# Altium PCB Carte_OPB-4L.PcbDoc
Units mm, origin at the board's own origin, x right, y up, seen from the top; angles counter-clockwise.
Board outline 18.5 x 10.6 mm, 4 copper layers (Top Copper, Ground Plane, Power Plane, Bottom Copper), stack 1.57 mm thick; 11 components, 7 nets, 32 pads, 4 vias.
Unrouted connection lines stored in the file: 6.
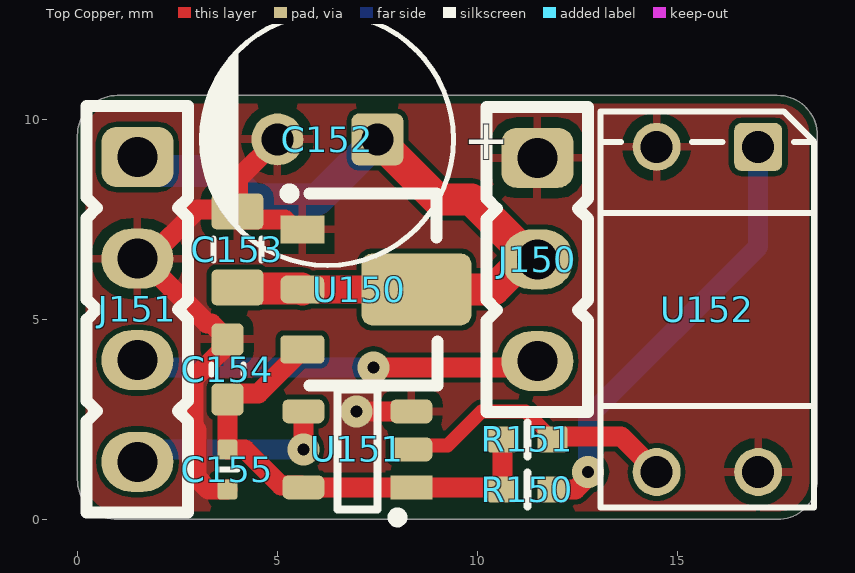
[diagram p0: Top Copper view]
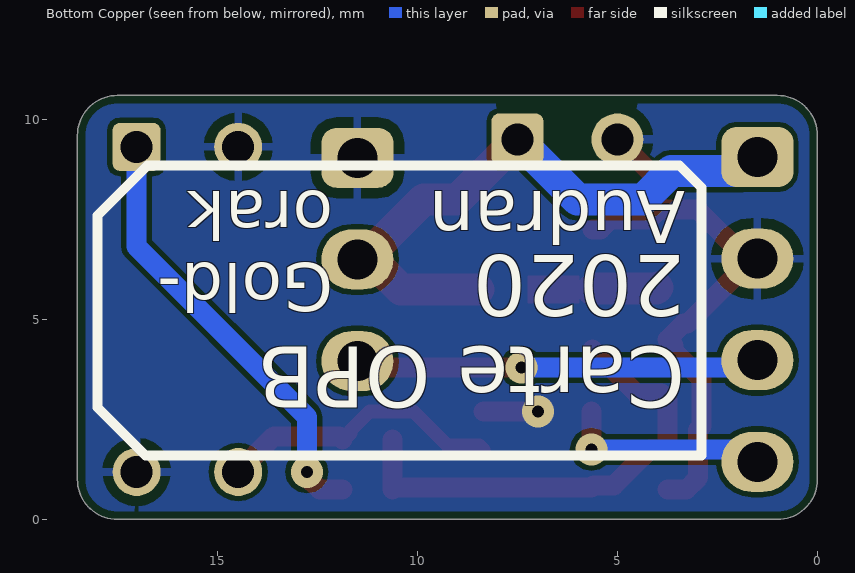
[diagram p1: Bottom Copper view, seen from below]
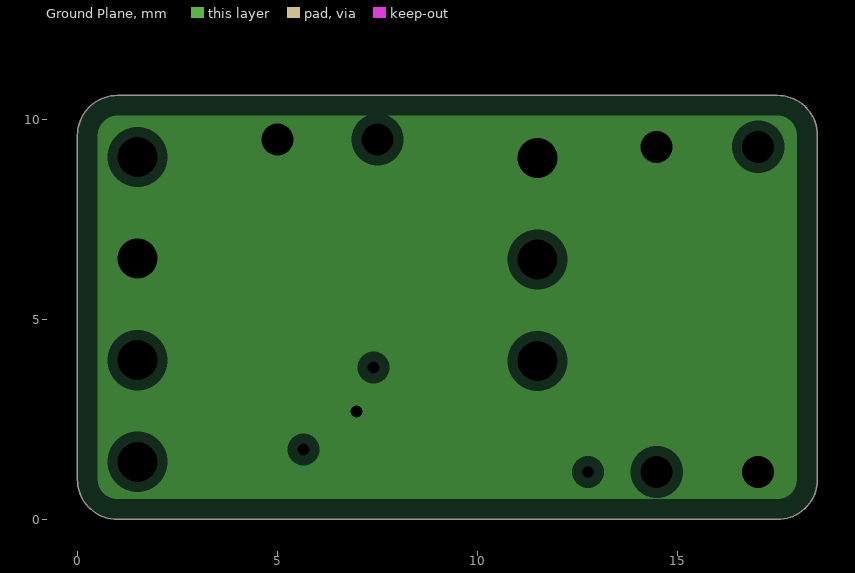
[diagram p2: Ground Plane, clearances drawn from the general rule]
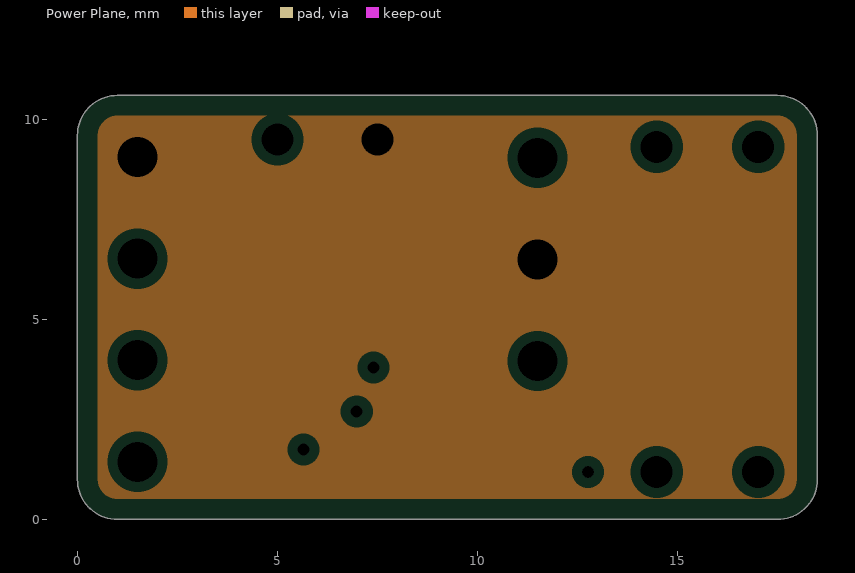
[diagram p3: Power Plane, clearances drawn from the general rule]
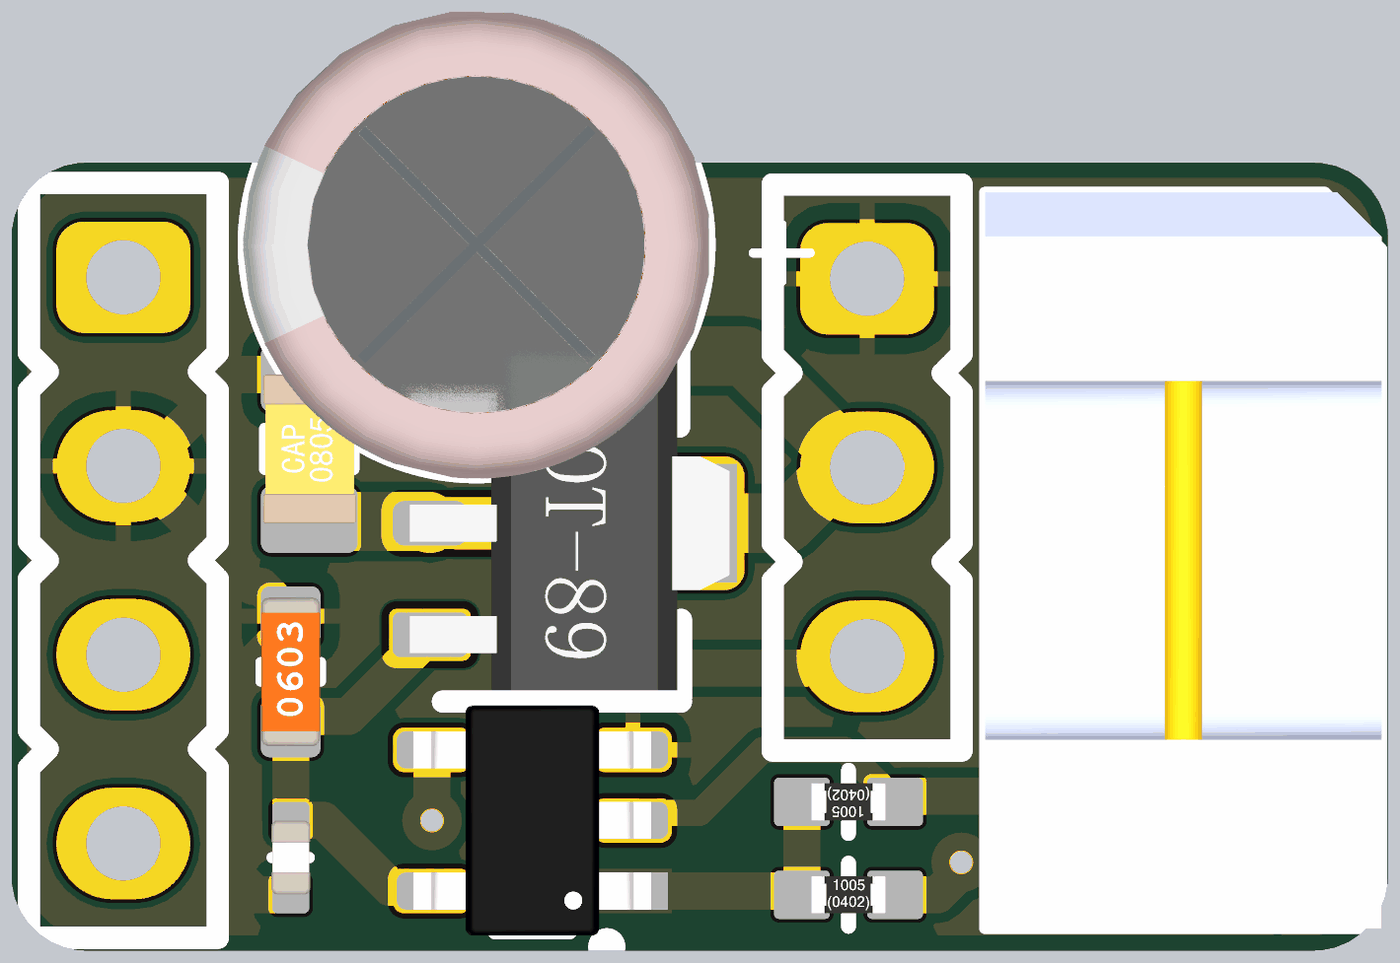
[diagram p4: 3D render of the assembled board from above, using the file's embedded part models]

## Layer stack, top to bottom
Top Mask: solder mask 0.015, Solder Resist, Dk 3.8
Top Copper: signal copper 0.035
Dielectric 1: prepreg 0.2, 7628, Dk 4.6
Ground Plane: plane copper 0.0175, net GND
Core: core 1.065, FR-4, Dk 4.5
Power Plane: plane copper 0.0175, net 5P
Dielectric 2: prepreg 0.2, 7628, Dk 4.6
Bottom Copper: signal copper 0.035
Bottom Mask: solder mask 0.015, Solder Resist, Dk 3.8

## Board outline
0,1 ccw(c1,1) 1,0 17.5,0 ccw(c17.5,1) 18.5,1 18.5,9.6 ccw(c17.5,9.6) 17.5,10.6 1,10.6 ccw(c1,9.6) 0,9.6

## Design rules (kind name [scope] priority, off if disabled: settings)
AssemblyTestPointUsage [All] p1 off:
AssemblyTestpoint [All] p1 off: testpointundercomponent=TRUE minsize=1.016 maxsize=2.54 preferedsize=1.524 minholesize=0 maxholesize=1.016 preferedholesize=0.813 testpointgrid=0.025 usegrid=TRUE gridtolerance=0 allowsidetop=TRUE allowsidebottom=TRUE
BoardOutlineClearance [All] p1: gap=0.2 ignorepadtopadclearanceinfootprint=FALSE
Clearance Clearance_Outer_layer [OnOutside] p1: gap=0.127 ignorepadtopadclearanceinfootprint=FALSE except(0.09: Arc-Arc Arc-Track Track-Track; 0.2: Arc-SMDPad Track-SMDPad; 0.254: Arc-Hole Track-Hole SMDPad-Hole THPad-Hole Via-Hole Fill-Hole Poly-Hole Region-Hole Text-Hole; 0.33: Arc-THPad Track-THPad SMDPad-THPad; 0.54: THPad-THPad)
Clearance Clearance_Inner_layer [not OnOutside] p2: gap=0.127 ignorepadtopadclearanceinfootprint=FALSE except(0.2: Arc-SMDPad Track-SMDPad; 0.254: Arc-Hole Track-Hole SMDPad-Hole THPad-Hole Via-Hole Fill-Hole Poly-Hole Region-Hole Text-Hole; 0.33: Arc-THPad Track-THPad SMDPad-THPad; 0.54: THPad-THPad)
ComponentClearance [IsComponent and (not (InComponent('J202') or InComponent('J204'))) vs IsComponent and (not (InComponent('J201') or InComponent('J203')))] p1: gap=0.2 collisioncheckmode=3 verticalgap=2540 showdistances=FALSE
DiffPairsRouting [All] p1 off: maxlimit=0.254 minlimit=0.254 mostfreqgap=0.254 toplayer_minwidth=0.381 toplayer_maxwidth=0.381 toplayer_prefwidth=0.381 bottomlayer_minwidth=0.381 bottomlayer_maxwidth=0.381 bottomlayer_prefwidth=0.381 maxuncoupledlength=12.7
FabricationTestPointUsage TestPointUsage [All] p1 off: valid=0 allowmultiple=FALSE
FabricationTestpoint Testpoint [All] p1 off: side=3 testpointundercomponent=TRUE minsize=1.016 maxsize=2.54 preferedsize=1.524 minholesize=0 maxholesize=1.016 preferedholesize=0.813 testpointgrid=0.025 allowsidetop=TRUE allowsidebottom=TRUE usegrid=TRUE gridtolerance=0
FanoutControl Fanout_BGA [IsBGA] p1 off: bgadir=Out bgaviamode=Centered fanoutstyle=Auto fanoutdirection=Alternating viagrid=0.025 // Fanout_BGA (Default Rule)
FanoutControl Fanout_LCC [IsLCC] p2 off: bgadir=Out bgaviamode=Centered fanoutstyle=Auto fanoutdirection=Alternating viagrid=0.025 // Fanout_LCC (Default Rule)
FanoutControl Fanout_SOIC [IsSOIC] p3 off: bgadir=Out bgaviamode=Centered fanoutstyle=Auto fanoutdirection=Alternating viagrid=0.025 // Fanout_SOIC (Default Rule)
FanoutControl Fanout_Small [(CompPinCount < 5)] p4 off: bgadir=Out bgaviamode=Centered fanoutstyle=Auto fanoutdirection=OutThenIn viagrid=0.025 // Fanout_Small (Default Rule)
FanoutControl Fanout_Default [All] p5 off: bgadir=Out bgaviamode=Centered fanoutstyle=Auto fanoutdirection=Alternating viagrid=0.025 // Fanout_Default (Default Rule)
HoleSize [All] p1: absolutevalues=TRUE maxlimit=6.3 minlimit=0.2 maxpercent=80.000 minpercent=20.000
HoleToHoleClearance ViaToViaClearance [IsVia vs IsVia] p1: gap=0.254 allowstackedmicrovias=TRUE
HoleToHoleClearance [All] p2: gap=0.54 allowstackedmicrovias=TRUE
MinimumAnnularRing [All] p1: minimumring=0.13
MinimumSolderMaskSliver [All] p1: minsoldermaskwidth=0.075
NetAntennae NetAntenna [All] p1: netantennaetolerance=0
PlaneClearance [All] p1: clearance=0.254
PlaneConnect [All] p1: planeconnectstyle=Direct reliefexpansion=0.3 reliefentries=4 reliefconductorwidth=0.3 reliefairgap=0.2
PolygonConnect [All] p1: thpad.connectstyle=Relief thpad.reliefconductorwidth=0.2 thpad.reliefentries=4 thpad.polygonreliefangle="90 Angle" thpad.airgapwidth=0.254 smdpad.connectstyle=Relief smdpad.reliefconductorwidth=0.2 smdpad.reliefentries=4 smdpad.polygonreliefangle="90 Angle" smdpad.airgapwidth=0.254 via.connectstyle=Direct via.reliefconductorwidth=0.2 via.reliefentries=4 via.polygonreliefangle="90 Angle" via.airgapwidth=0.254
RoutingVias [All] p1: holewidth=0.2 width=0.5 viastyle="Through Hole" minholewidth=0.2 minwidth=0.45 maxholewidth=0.3 maxwidth=0.9
SMDEntry [All] p1: side=TRUE corner=TRUE anyangle=TRUE
SilkToSilkClearance [All] p1 off: silktosilkclearance=0.15
SilkToSolderMaskClearance [IsPad] p1: minsilkscreentomaskgap=0.15 clearancetoexposedcopper=TRUE
SolderMaskExpansion [All] p1: expansion=0.05 istentingtop=FALSE
Width Width_Outer_Layer [OnLayer('Component Side') or OnLayer('Solder Side')] p1: maxlimit=3 minlimit=0.09 preferedwidth=0.15
Width Width_Inner_Layer [All] p2: maxlimit=3 minlimit=0.127 preferedwidth=0.15
11 further rules are at their usual default settings.

## Classes and differential pairs
net class TrigSchmit: 3L Capteur GND OPB_S
net class LDO: 3L 5P GND
net class FourcheOpt: 3L GND OPB_A OPB_S
net class Connector: 5P Capteur GND Servo

## Components (designator, comment, footprint, x,y, rotation, side; value= is the part's Value field where it differs from the comment)
C152 "220 uF" WCAP-ATG8_6.3x11x2.5x0.5 6.25,9.5 r0 top
C153 "10uF" "WCAP-CSGP_0805, 2x1.25x1.25" 4,6.75 r90 top
C154 "4.7uF" "WCAP-CSGP_0603, 1.6x0.8x0.8" 3.75,3.75 r90 top
C155 "100nF" "WCAP-CSGP_0402, 1x0.5x0.5" 3.75,1.25 r270 top
J150 "22-03-2031" 22-03-2031 11.5,6.5 r90 top
J151 "22-03-2041" 22-03-2041 1.5,5.25 r90 top
R150 "RC0402FR-07330RL" RESC1005X04N 11.25,0.75 r0 top value=330
R151 "RC0402FR-07100KL" RESC1005X04N 11.25,2 r180 top value=100k
U150 "HT7533-1" SOT89-150P350X160-3N 7.75,5.75 r0 top value=3.3V
U151 "SN74LVC1G17DBVR" SOT23_95P280X145-5N 7,1.75 r180 top
U152 "OPB620" OPB620 15.75,5.25 r270 top

## Footprints (in the part's own frame and the unit in brackets; to place one, negate y for a bottom-side part, rotate by r counter-clockwise, add the part's x,y. Pads: shape width x height; smd on the part's side, far side on the other; paste and mask are expansions set on the pad)
22-03-2031 [mm]
  rrect50% 1.5x1.8 hole 1: 1(2.54,0)
  oval 1.5x1.8 hole 1: 2(0,0) 3(-2.54,0)
  silkscreen extent -3.81,-1.27 3.81,1.27, body extent -3.81,-1.27 3.81,1.27, height 11.6
22-03-2041 [mm]
  rrect50% 1.5x1.8 hole 1: 1(3.81,0)
  oval 1.5x1.8 hole 1: 2(1.27,0) 3(-1.27,0) 4(-3.81,0)
  silkscreen extent -5.08,-1.27 5.08,1.27, body extent -5.08,-1.27 5.08,1.27, height 11.6
OPB620 [mm]
  rrect30% 1.2x1.2 hole 0.8: 1(-4.064,1.27)
  round 1.2 hole 0.8: 2(-4.064,-1.27) 3(4.064,-1.27) 4(4.064,1.27)
  silkscreen extent -4.95,-2.67 4.95,2.67, body extent -4.96,-2.66 4.95,2.67, height 9.37
RESC1005X04N [mm] "Chip Resistor, 2-Leads, Body 1,1x0,5mm, IPC Medium Density"
  rrect20% 0.75x0.65 smd: 1(-0.625,0) 2(0.625,0)
  silkscreen extent 0,-0.43 0,0.43, body extent -0.5,-0.25 0.5,0.25, height 0.35
SOT23_95P280X145-5N [mm] "SOT23, 5-Leads, Body 3,1x3,2mm (max), Pitch 0,95mm, IPC Medium Densit"
  rect 1.05x0.6 smd paste-0.05 mask+0.07: 1(-1.35,0.95)
  rrect50% 1.05x0.6 smd paste-0.05 mask+0.07: 2(-1.35,0) 3(-1.35,-0.95) 4(1.35,-0.95) 5(1.35,0.95)
  silkscreen extent -1.13,-1.5 0.5,1.82, body extent -1.6,-1.55 1.6,1.55, height 1.45
SOT89-150P350X160-3N [mm] "SOT89, 3-Leads, Body 4.5x4.1mm, Pitch 1.5mm, Lead Span 1.05mm, IPC Medium Density"
  rect 1.1x0.7 smd paste-0.05 mask+0.102: 1(-2.127,1.5)
  rrect50% 1.1x0.7 smd paste-0.05 mask+0.102: 2(-2.128,0)
  rrect30% 2.75x1.8 smd paste-10: 2(0.728,0)
  rrect30% 1.1x0.7 smd paste-0.05 mask+0.102: 3(-2.127,-1.5)
  Top Copper region: -1.8,-0.351 -0.5,-0.351 -0.5,0.348 -1.8,0.348
  silkscreen extent -2.57,-2.4 1.25,2.52, body extent -2.4,-2.25 1.9,2.25, height 1.53
WCAP-ATG8_6.3x11x2.5x0.5 [mm] "Polarized capacitors, Aluminum Electrolytic Capacitors, 2-Leads, Body 6.3x11x2.5x0.5"
  rrect30% 1.3x1.3 hole 0.8: 1(1.25,0)
  round 1.3 hole 0.8: 2(-1.25,0)
  silkscreen extent -3.15,-3.15 3.15,3.15, body extent -3.14,-3.15 3.15,3.15, height 11.11
"WCAP-CSGP_0402, 1x0.5x0.5" [mm] "WCAP-CSGP Ceramic Capacitors, size 0402, body 1x0.5x0.5"
  rrect30% 0.5x0.5 smd: 1(-0.5,0) 2(0.5,0)
  silkscreen extent 0,-0.25 0,0.25, body extent -0.5,-0.26 0.5,0.26, height 0.52
"WCAP-CSGP_0603, 1.6x0.8x0.8" [mm] "WCAP-CSGP Ceramic Capacitors, size 0603, body 1.6x0.8x0.8"
  rrect30% 0.8x0.8 smd: 1(-0.75,0) 2(0.75,0)
  silkscreen extent -0.13,-0.4 0.13,0.4, body extent -1,-0.39 1,0.39, height 0.8
"WCAP-CSGP_0805, 2x1.25x1.25" [mm] "WCAP-CSGP Ceramic Capacitors, size 0805, body 2x1.25x1.25"
  rrect30% 0.9x1.3 smd: 1(-0.95,0) 2(0.95,0)
  silkscreen extent -0.28,-0.6 0.28,0.6, body extent -1,-0.63 1,0.62, height 1.25

## Part data
C152: library part "WCAP-ATG8, 860010373010", "CAP Alu 220 UF 20% 16 V", Manufacturer="Wurth Elektronik", Manufacturer Part Number=860010373010, RatedVoltage=16V, ComponentLink1Description=Datasheet, ComponentLink1URL=http://katalog.we-online.de/pbs/datasheet/860010373010.pdf, Size=6.3mmx11mm
C153: library part "WCAP-CSGP, 885012207026", "CAP CER 10uF 10V X7R 0805", Manufacturer="Wurth Elektronik", Manufacturer Part Number=885012207026, RatedVoltage=10V, SUPPLIER PART NUMBER 1=2495189, CeramicType=X7R, ComponentLink1Description=Datasheet, ComponentLink1URL=http://katalog.we-online.com/pbs/datasheet/885012207026.pdf, Size=0805, SUPPLIER 1=Farnell, SUPPLIER 2=JLCPCB, Supplier Footprint 2=0805, SUPPLIER PART NUMBER 2=C15850
C154: library part "WCAP-CSGP, 885012106012", "CAP CER 4.7UF 10V X5R 0603", Manufacturer="Wurth Elektronik", Manufacturer Part Number=885012106012, RatedVoltage=10V, CeramicType=X5R, ComponentLink1Description=Datasheet, ComponentLink1URL=http://katalog.we-online.com/pbs/datasheet/885012106012.pdf, Size=0603, SUPPLIER 2=JLCPCB, Supplier Footprint 2=0603, SUPPLIER PART NUMBER 2=C19666
C155: library part "WCAP-CSGP, 885012205037", "CAP CER 100nF 16V X7R 0402", Manufacturer="Wurth Elektronik", Manufacturer Part Number=885012205037, RatedVoltage=16V, CeramicType=X7R, ComponentLink1Description=Datasheet, ComponentLink1URL=http://katalog.we-online.com/pbs/datasheet/885012205037.pdf, Size=0402, SUPPLIER 2=JLCPCB, Supplier Footprint 2=0402, SUPPLIER PART NUMBER 2=C1525
J150: "CONN HEADER VERT 3POS 2.54MM", Manufacturer=MOLEX, SUPPLIER PART NUMBER 1=9731083, ComponentLink1Description=Datasheet, ComponentLink1URL=http://www.farnell.com/datasheets/1785732.pdf, ComponentLink2Description=Drawings, ComponentLink2URL="http://www.farnell.com/cad/495071.pdf  http://www.farnell.com/cad/1533907.pdf  http://www.farnell.com/cad/1533907.pdf", Manufacturer Part Number=22-03-2031, SUPPLIER 1=Farnell
J151: "CONN HEADER VERT 4POS 2.54MM", Manufacturer=MOLEX, SUPPLIER PART NUMBER 1=9731091, ComponentLink1Description=Datasheet, ComponentLink1URL=https://www.molex.com/pdm_docs/sd/022032041_sd.pdf, Manufacturer Part Number=22-03-2041, SUPPLIER 1=Farnell
R150: "RES SMD 330 OHM 1% 1/16W 0402", Manufacturer=Yageo, POWER=63mW, SUPPLIER PART NUMBER 1=9239170, ComponentLink1Description=Manufacturer, ComponentLink1URL=http://www.yageo.com/NewPortal/_en/index.jsp, ComponentLink2Description=Datasheet, ComponentLink2URL=http://www.farnell.com/datasheets/2167052.pdf, Manufacturer Part Number=RC0402FR-07330RL, Precision=±1%, SUPPLIER 1=Farnell, SUPPLIER 2=JLCPCB, Supplier Footprint 2=0402, SUPPLIER PART NUMBER 2=C25104, Type="Thick Film", Vmax=50V
R151: "RES SMD 100K OHM 1% 1/16W 0402", Manufacturer=Yageo, POWER=63mW, SUPPLIER PART NUMBER 1=9239472, ComponentLink1Description=Manufacturer, ComponentLink1URL=http://www.yageo.com/NewPortal/_en/index.jsp, ComponentLink2Description=Datasheet, ComponentLink2URL=http://www.farnell.com/datasheets/2167052.pdf, Manufacturer Part Number=RC0402FR-07100KL, Precision=±1%, SUPPLIER 1=Farnell, SUPPLIER 2=JLCPCB, Supplier Footprint 2=0402, SUPPLIER PART NUMBER 2=C25741, Type="Thick Film", Vmax=50V
U150: "LDO 3.3V 100mA SOT89", Manufacturer=Holtek, SUPPLIER PART NUMBER 1=8850721, ComponentLink1Description=Datasheet, ComponentLink1URL=https://datasheet.lcsc.com/szlcsc/1812071811_Holtek-Semicon-HT7533-1_C14289.pdf, ComponentLink2Description=Manufacturer, ComponentLink2URL=https://www.holtek.com/productdetail/-/vg/75xx_1, Manufacturer Part Number=HT7533-1, SUPPLIER 1=RSComponents, SUPPLIER 2=JLCPCB, Supplier Footprint 2=SOT-89-3, SUPPLIER PART NUMBER 2=C14289, Type=LDO
U151: "IC BUF NON-INVERT 5.5V SOT23-5", Manufacturer="TEXAS INSTRUMENTS", SUPPLIER PART NUMBER 1=3119606, ComponentLink1Description=Datasheet, ComponentLink1URL=https://www.ti.com/lit/ds/symlink/sn74lvc1g17.pdf?ts=1590614797325, Manufacturer Part Number=SN74LVC1G17DBVR, SUPPLIER 1=Farnell
U152: "SENSOR OPT SLOT TRANS W/RES PCB", Manufacturer="TT ELECTRONICS", SUPPLIER PART NUMBER 1=491330, ComponentLink1Description=Datasheet, ComponentLink1URL=http://www.farnell.com/datasheets/2702441.pdf, Manufacturer Part Number=OPB620, SUPPLIER 1=Farnell

## Via types
v1: diameter 0.8, hole 0.3, Top Copper to Bottom Copper, tented both sides, 4 vias

## Nets (pads, with @x,y where several pads share a name; then routed paths per layer and width w, separated by ;. In a path a pad name is that pad's centre, name@x,y a point inside that pad or via, vN(x,y) a via of type N, cw(c..) or ccw(c..) an arc to the next point about the centre after c; other vN are vias at no path point)
3L: C154.1 C155.1 R150.1 R151.2 U150.3 U151.1 U151.5 | length 12.2
  Top Copper w0.5: U150.3 4.523,3.15 3.9,3.15 C154.1 C155.1 4.19,1.75 5.09,0.85 5.6,0.85 U151.5 U151.1 10.575,0.8 R150.1 R151.2
5P: C152.1 C153.1 J150.2 J151.1 U150.2 | length 17.1
  Top Copper w0.8: C153.1 4.025,5.775 5.597,5.775 U150.2@5.622,5.75 ; C152.1 9,8 9.85,8 J150.2@11.35,6.5 ; U150.2@8.478,5.75 10.411,5.75 11.161,6.5 J150.2@11.35,6.5 ; J150.2 J150.2@11.35,6.5
  Bottom Copper w0.8: J151.1 1.85,8.71 3.645,8.71 4.355,8 6,8 7.25,9.25 C152.1
Capteur: J151.4 U151.4 | length 5.2
  Top Copper w0.5: v1(5.65,1.75) U151.4
  Bottom Copper w0.5: J151.4 1.81,1.75 v1(5.65,1.75)
GND: C152.2 C153.2 C154.2 C155.2 J150.1 J151.2 U150.1 U151.3 U152.2 U152.4 | length 16.2
  Top Copper w0.5: C155.2 3.273,0.75 2.98,1.043 2.98,2.24 2.9,2.32 2.9,3.516 3.6,4.216 3.6,4.35 C154.2 3.35,4.9 3.243,4.9 1.623,6.52 J151.2 1.77,6.52 3,7.75 3.95,7.75 C153.2 ; C152.2 4.01,8.51 4.01,7.71 C153.2 ; U150.1 5.423,7.25 5.173,7.5 4.2,7.5 C153.2 ; v1(6.98,2.7) U151.3
OPB_A: R150.2 U152.1 | length 11
  Top Copper w0.5: R150.2 12.45,0.75 12.766,1.066 v1(12.766,1.186)
  Bottom Copper w0.5: v1(12.766,1.186) 12.766,2.566 17.02,6.82 U152.1
OPB_S: R151.1 U151.2 U152.3 | length 7.3
  Top Copper w0.35: U151.2 8.45,1.85 9.247,1.85 10.097,2.7 11.2,2.7 11.675,2.225 11.675,2.15 11.825,2 R151.1
  Top Copper w0.5: R151.1 11.887,2.013 11.952,2.077 13.589,2.077 U152.3
Servo: J150.3 J151.3 | length 10.2
  Top Copper w0.5: v1(7.4,3.8) 11.3,3.8 11.48,3.98 J150.3
  Bottom Copper w0.5: J151.3 1.68,3.8 v1(7.4,3.8)

## Polygon pours and split planes (outlines as drawn)
GND on Bottom Copper "Solder Side-GND" (solid, pour order 49): 0,1 0,9.6 cw(c1,9.6) 1,10.6 17.5,10.6 cw(c17.5,9.6) 18.5,9.6 18.5,1 cw(c17.5,1) 17.5,0 1,0 cw(c1,1)
GND on Top Copper "Component Side-GND" (solid, pour order 47): 0,1 0,9.6 cw(c1,9.6) 1,10.6 17.5,10.6 cw(c17.5,9.6) 18.5,9.6 18.5,1 cw(c17.5,1) 17.5,0 1,0 cw(c1,1)
GND on Ground Plane (split plane): 17.596,10.082 17.688,10.054 17.773,10.009 17.848,9.948 17.909,9.873 17.954,9.788 17.982,9.696 17.991,9.612 17.99,9.6 17.99,1 17.991,0.988 17.982,0.904 17.954,0.812 17.909,0.727 17.848,0.652 17.773,0.591 17.688,0.546 17.596,0.518 17.512,0.509 17.5,0.51 1,0.51 0.988,0.509 0.904,0.518 0.812,0.546 0.727,0.591 0.652,0.652 0.591,0.727 0.546,0.812 0.518,0.904 0.509,0.988 0.51,1 0.51,9.6 0.509,9.612 0.518,9.696 0.546,9.788 0.591,9.873 0.652,9.948 0.727,10.009 0.812,10.054 0.904,10.082 0.988,10.091 1,10.09 17.5,10.09 17.512,10.091
5P on Power Plane (split plane): 17.596,10.082 17.688,10.054 17.773,10.009 17.848,9.948 17.909,9.873 17.954,9.788 17.982,9.696 17.991,9.612 17.99,9.6 17.99,1 17.991,0.988 17.982,0.904 17.954,0.812 17.909,0.727 17.848,0.652 17.773,0.591 17.688,0.546 17.596,0.518 17.512,0.509 17.5,0.51 1,0.51 0.988,0.509 0.904,0.518 0.812,0.546 0.727,0.591 0.652,0.652 0.591,0.727 0.546,0.812 0.518,0.904 0.509,0.988 0.51,1 0.51,9.6 0.509,9.612 0.518,9.696 0.546,9.788 0.591,9.873 0.652,9.948 0.727,10.009 0.812,10.054 0.904,10.082 0.988,10.091 1,10.09 17.5,10.09 17.512,10.091

## Other copper
Top Copper:
  region: 1.5,6.52

## Silkscreen, mask and mechanical layers (free items; w line width, h text height)
Bottom Overlay:
  lines w0.254: 2.9,1.6 16.8,1.6 18,2.8 18,7.6 16.75,8.85 3.45,8.85 2.9,8.3 2.9,1.6
  text "Audran" at 3.3,8.2 h1.3 r180
  text "Gold- / orak" at 12.1,8.2 h1.2 r180
  text "Carte OPB / 2020" at 3.3,6.6 h1.52 r180
Board Outline:
  the board outline again, w0.1

## Dimensions
1,0 to 1,10.6 on Dimension
0,1 to 18.5,1 on Dimension

## Text inside footprints (layer, text, board x,y; h text height)
C152: Top Overlay "+" at 9.65,9 h1; Top 3D Body "+" at 8.45,9 h1